# EAGLE board pcb2 (EAGLE 9.3.0)
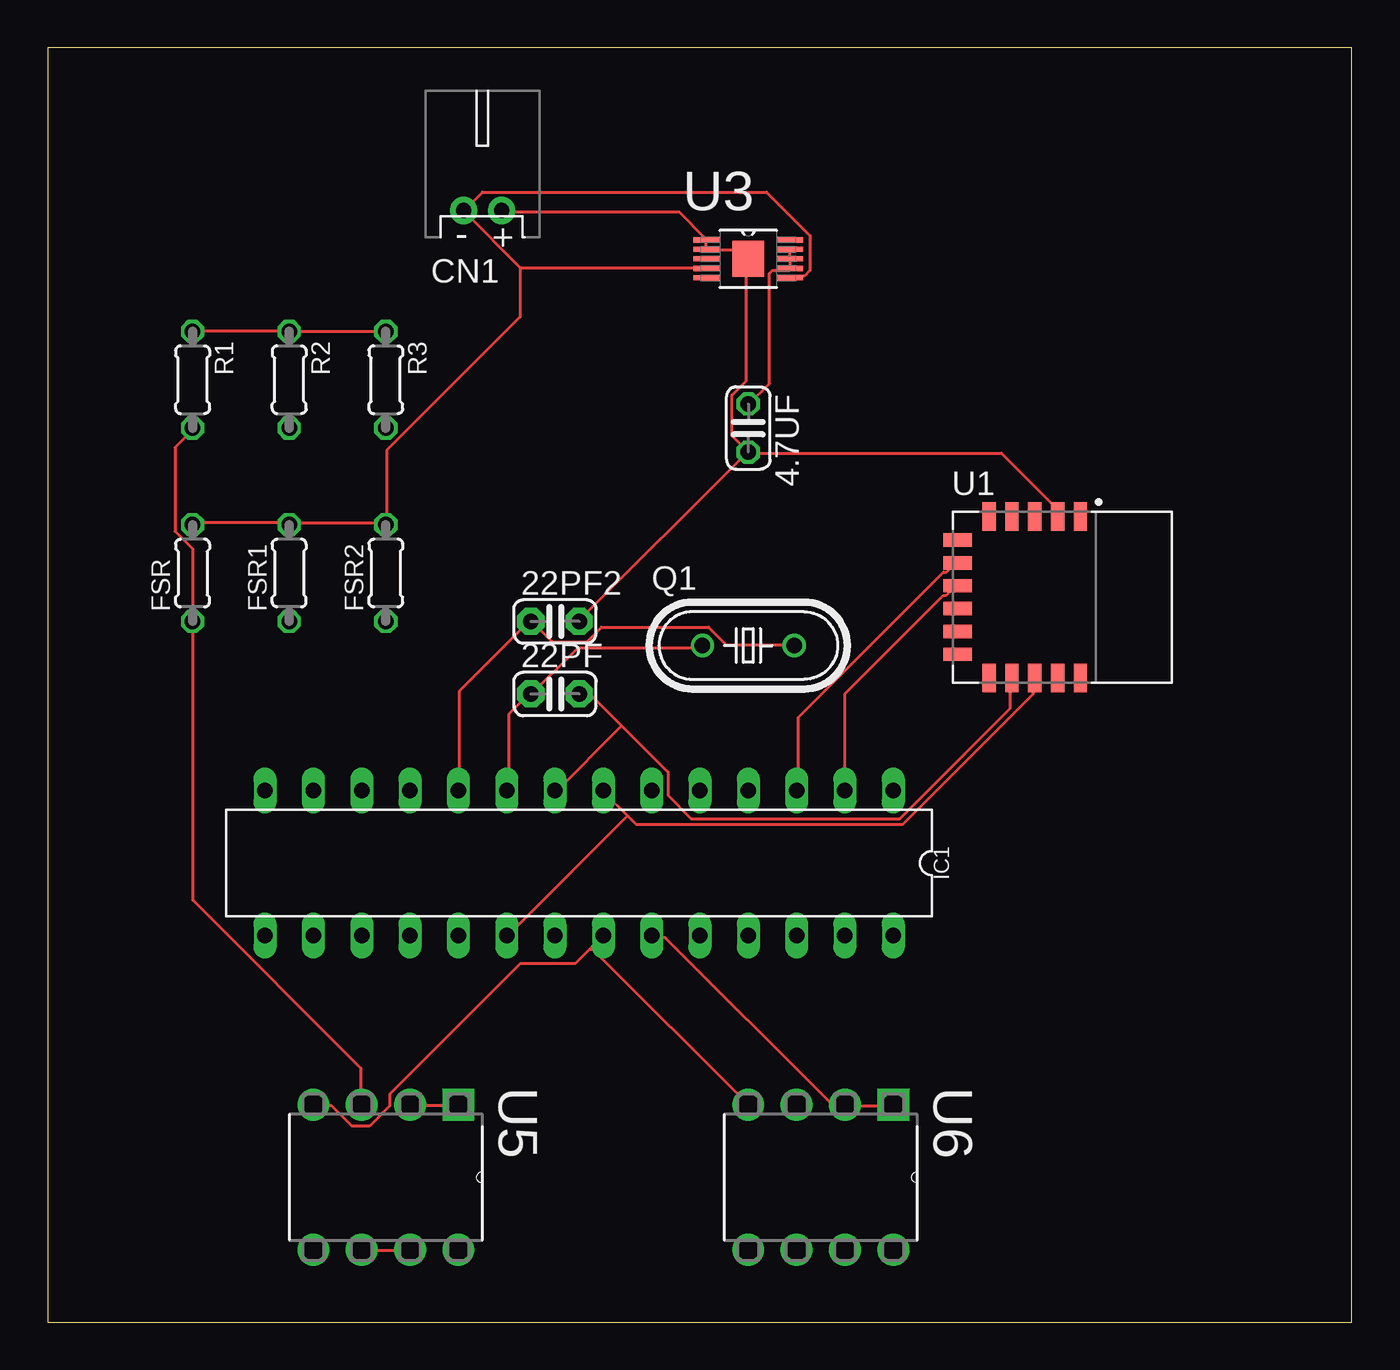
[diagram p0: board, top side]
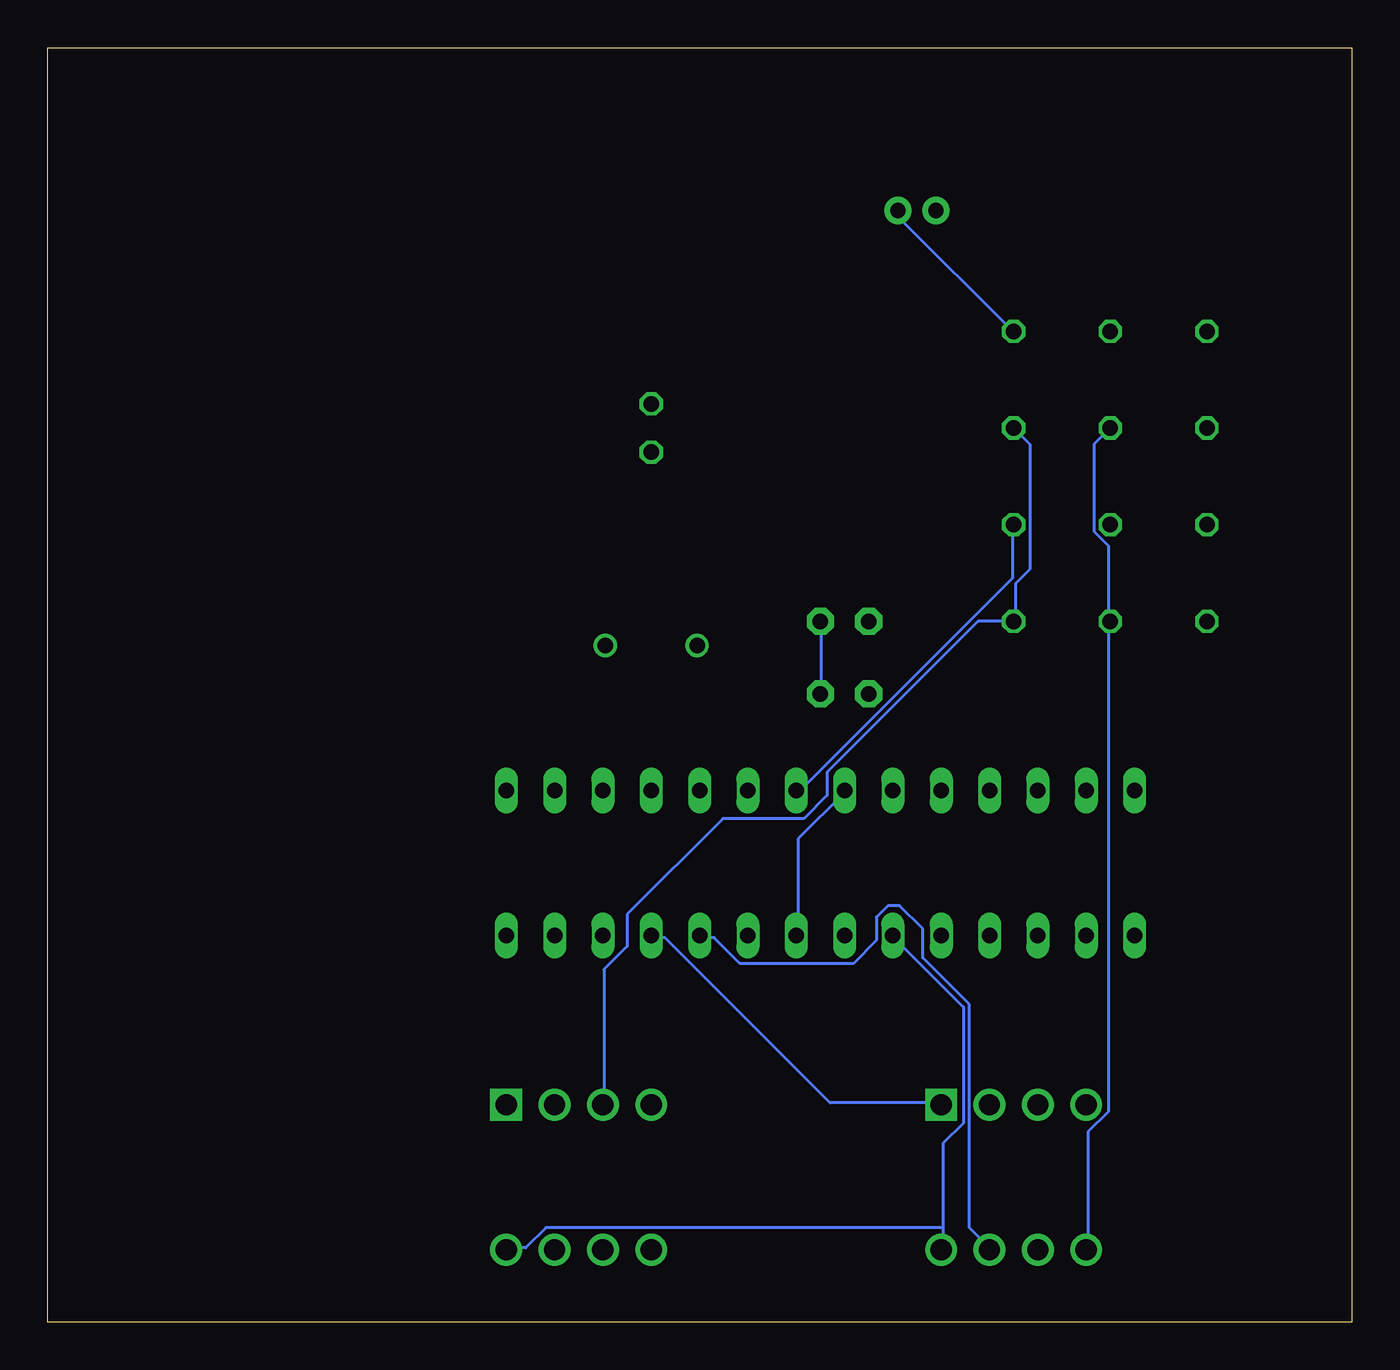
[diagram p1: board, bottom side, seen from below]

Size 68.56 x 66.98 mm. Coordinates in mm from the lower left corner, seen from the top.
Outline: 0,0 68.56,0 68.56,66.98 0,66.98 0,0
Copper layers (1*16): Top 0.035mm / dielectric 1.5mm / Bottom 0.035mm
Design rules "PCBWay_2layer": minimum track width 6mil, minimum drill 0.3mm, track to track 6mil, track to pad 6mil, pad to pad 6mil, via to via 6mil, smd to smd 4mil, copper to edge 10mil, drill to drill 6mil, minimum pad ring 6mil, minimum via ring 6mil, stop-mask expansion 4mil, vias tented up to drill 0.8mm, thermal gap 10mil

## Footprints (pad centres in the part's own frame; a part is rotated, then mirrored left to right if it is on the bottom)
C025-024X044 = drill 0.813 octagon: 1 -1.27,0; 2 1.27,0
C025-024X044' = drill 0.813 pad 1.422 octagon: 1 -1.27,0; 2 1.27,0
JST-PH-2-THM-RA = drill 0.8 pad 1.422: 1 1,0; 2 -1,0
0204/5 = drill 0.813 octagon: 1 -2.54,0; 2 2.54,0
DIL28 = drill 0.813 long: 1 -3.81,16.51; 2 -3.81,13.97; 3 -3.81,11.43; 4 -3.81,8.89; 5 -3.81,6.35; 6 -3.81,3.81; 7 -3.81,1.27; 8 -3.81,-1.27; 9 -3.81,-3.81; 10 -3.81,-6.35; 11 -3.81,-8.89; 12 -3.81,-11.43; 13 -3.81,-13.97; 14 -3.81,-16.51; 15 3.81,-16.51; 16 3.81,-13.97; 17 3.81,-11.43; 18 3.81,-8.89; 19 3.81,-6.35; 20 3.81,-3.81; 21 3.81,-1.27; 22 3.81,1.27; 23 3.81,3.81; 24 3.81,6.35; 25 3.81,8.89; 26 3.81,11.43; 27 3.81,13.97; 28 3.81,16.51
HC49U-V = drill 0.813: 1 -2.413,0; 2 2.413,0
XCVR_RN4871-V/RM118 = smd 1.5 x 0.7: 1 -4.25,0.95; 2 -4.25,-0.25; 3 -4.25,-1.45; 4 -4.25,-2.65; 5 -4.25,-3.85; 12 4.25,-3.85; 13 4.25,-2.65; 14 4.25,-1.45; 15 4.25,-0.25; 16 4.25,0.95 | smd 0.7 x 1.5: 6 -3,-5.5; 7 -1.8,-5.5; 8 -0.6,-5.5; 9 0.6,-5.5; 10 1.8,-5.5; 11 3,-5.5
SOP50P490X110-11N = smd 1.397 x 0.279: 1 -2.184,0.991; 2 -2.184,0.508; 3 -2.184,0; 4 -2.184,-0.508; 5 -2.184,-0.991; 6 2.184,-0.991; 7 2.184,-0.508; 8 2.184,0; 9 2.184,0.508; 10 2.184,0.991 | smd 1.676 x 1.88: 11 0,0
DIP254P762X508-8 = drill 1.118 square: 1 -7.62,7.62 | drill 1.118: 2 -7.62,5.08; 3 -7.62,2.54; 4 -7.62,0; 5 0,0; 6 0,2.54; 7 0,5.08; 8 0,7.62

## Placement (x,y rotation side)
4.7UF  [C025-024X044]  36.83,46.99 270 top
22PF  [C025-024X044']  26.67,33.02 0 top
22PF2  [C025-024X044']  26.67,36.83 0 top
CN1  [JST-PH-2-THM-RA]  22.86,58.42 0 top
FSR  [0204/5]  7.62,39.37 90 top
FSR1  [0204/5]  12.7,39.37 90 top
FSR2  [0204/5]  17.78,39.37 90 top
IC1  ATMEGA328-PU  [DIL28]  27.94,24.13 270 top
Q1  [HC49U-V]  36.83,35.56 0 top
R1  [0204/5]  7.62,49.53 270 top
R2  [0204/5]  12.7,49.53 270 top
R3  [0204/5]  17.78,49.53 270 top
U1  RN4871-V/RM118  [XCVR_RN4871-V/RM118]  53.34,38.1 270 top
U3  LTC3588IMSE-1PBF  [SOP50P490X110-11N]  36.83,55.88 0 top
U5  LM358P  [DIP254P762X508-8]  13.97,3.81 270 top
U6  LM358P  [DIP254P762X508-8]  36.83,3.81 270 top

## Library data of the parts
4.7UF = rcl; SPICEPREFIX: C
22PF 22PF2 CN1 = adafruit
FSR FSR1 FSR2 R1-R3 = rcl; SPICEPREFIX: R
IC1 = ATMEGA328-PU; AVAILABILITY: Unavailable; DESCRIPTION: ATmega Series 20 MHz 32 KB Flash 2 KB SRAM 8-Bit Microcontroller - DIP-28; MF: Microchip; MP: ATMEGA328-PU; PACKAGE: PDIP-28 Microchip; PRICE: None
Q1 = adafruit; OC_FARNELL: 1666969; OC_NEWARK: unknown
U1 = RN4871-V_RM118; DESCRIPTION: Bluetooth 4.2 BLE Module Shielded Antenna ASCII Interface 9x11.5mm; DIGI-KEY_PART_NUMBER: RN4871-V/RM118-ND; DIGI-KEY_PURCHASE_URL: https://www.digikey.com/product-detail/en/microchip-technology/RN4871-V-RM118/RN4871-V-RM118-ND/6130476?utm_source=snapeda&utm_medium=aggregator&utm_campaign=symbol; MF: Microchip; MP: RN4871-V/RM118; PACKAGE: SMD-16 Microchip
U3 = LTC3588IMSE-1PBF; DESCRIPTION: Piezoelectric Energy Harvesting Power Supply 10-Pin MSOP EP; DIGI-KEY_PART_NUMBER: LTC3588IMSE-1#PBF-ND; DIGI-KEY_PURCHASE_URL: https://www.digikey.com/product-detail/en/linear-technology-analog-devices/LTC3588IMSE-1-PBF/LTC3588IMSE-1-PBF-ND/2213930?utm_source=snapeda&utm_medium=aggregator&utm_campaign=symbol; MF: Linear Technology/Analog; MP: LTC3588IMSE-1#PBF; PACKAGE: MSOP-10 Linear Technology
U5 U6 = LM358P; AVAILABILITY: Unavailable; DESCRIPTION: OP Amp Dual GP Â±16V/32V 8-Pin PDIP OP Amp Dual GP Â±16V/32V 8-Pin PDIP; MF: Texas Instruments; MP: LM358P; PACKAGE: SO-8 Texas Instruments; PRICE: None

## Nets
GND: 4.7UF.2 22PF2.2 22PF.2 CN1.1 IC1.8 IC1.22 R1.1 R2.1 R3.1 U1.2 U1.13 U3.1 U3.2 U3.11 U5.4 U6.4
N$1: IC1.2 U1.8
N$2: IC1.3 U1.7
N$4: CN1.2 FSR1.2 FSR2.2 FSR.2 IC1.7 IC1.20 U1.14 U3.4 U3.6 U5.8 U6.8
N$5: FSR2.1 R3.2 U6.3
N$6: IC1.23 U6.1 U6.2
N$7: FSR.1 R1.2 U5.3
N$8: IC1.25 U5.1 U5.2
N$9: IC1.24 U5.6 U5.7
N$10: FSR1.1 R2.2 U5.5
N$11: 4.7UF.1 U3.7 U3.8 U3.9
N$12: 22PF.1 IC1.9 Q1.1
N$13: 22PF2.1 IC1.10 Q1.2

## Tracks (layer width: path | path; a pad name or v marks a point on that pad's centre or on a via)
GND
  Top 0.152: R1.1 R2.1 R3.1 | 36.73,55.88 36.27,56.34 34.75,56.34 U3.2 34.59,56.49 34.59,56.79 U3.1 34.59,56.95 33.22,58.32 23.93,58.32 CN1.1 | U1.2 53.03,42.47 53.03,42.77 50.14,45.67 36.88,45.67 4.7UF.2 | 36.73,55.88 36.73,49.48 35.97,48.72 35.97,46.58 4.7UF.2 | 36.73,55.88 U3.11 | 30.17,31.34 28.5,33.02 22PF.2 | 30.17,31.34 32.61,28.91 32.61,27.69 33.83,26.47 44.81,26.47 50.6,32.26 50.6,33.78 U1.13 | IC1.22 28.5,19.61 | 28.5,19.61 27.74,18.85 24.84,18.85 17.98,11.99 17.98,11.38 16.92,10.31 16,10.31 14.94,11.38 14.02,11.38 U5.4 | U6.4 28.65,19.61 28.5,19.61 | 30.17,31.34 26.67,27.84 IC1.8 | 4.7UF.2 36.73,45.67 27.89,36.83 22PF2.2
  Bottom 0.152: CN1.1 23.77,58.32 23.77,58.01 17.83,52.07 R3.1 | 22PF2.2 27.89,36.83 27.89,33.02 22PF.2 | IC1.22 29.11,20.37 29.11,25.4 26.67,27.84 IC1.8
N$1
  Top 0.152: IC1.2 41.91,33.02 47.09,38.2 47.24,38.2 47.7,38.66 U1.8
N$2
  Top 0.152: U1.7 47.7,39.88 47.24,39.42 47.09,39.42 39.47,31.8 39.47,27.99 IC1.3
N$4
  Top 0.152: FSR.2 7.62,42.01 12.65,42.01 FSR1.2 12.8,42.01 17.68,42.01 FSR2.2 17.83,42.01 17.83,45.82 24.84,52.83 24.84,55.42 | 24.84,55.42 34.59,55.42 U3.4 | 24.84,55.42 21.95,58.32 CN1.2 21.95,58.47 22.86,59.39 37.8,59.39 40.08,57.1 40.08,55.27 39.78,54.97 39.01,54.97 U3.6 | 30.48,26.62 29.26,27.84 IC1.7 | 30.48,26.62 30.94,26.16 44.96,26.16 51.82,33.02 51.82,33.78 U1.14 | 30.48,26.62 24.23,20.37 IC1.20
  Bottom 0.152: 21.49,4.98 21.49,9.4 20.42,10.46 20.42,16.56 24.08,20.22 IC1.20 | 21.49,4.98 21.49,3.91 U5.8 | 21.49,4.98 42.37,4.98 43.43,3.91 44.35,3.91 U6.8 | FSR2.2 17.83,41.86 17.83,39.12 29.11,27.84 IC1.7
N$5
  Bottom 0.152: R3.2 16.92,46.13 16.92,39.57 17.68,38.81 17.68,36.83 FSR2.1 19.66,36.83 27.58,28.91 27.58,27.69 28.8,26.47 33.07,26.47 38.1,21.44 38.1,19.76 39.32,18.54 39.32,11.53 U6.3
N$6
  Top 0.152: IC1.23 31.85,20.22 32.46,20.22 41.15,11.53 41.91,11.53 U6.2 41.91,11.38 44.35,11.38 U6.1
N$7
  Top 0.152: R1.2 7.62,46.89 6.71,45.97 6.71,41.55 7.62,40.64 FSR.1 7.62,22.2 16.46,13.36 16.46,11.53 U5.3
N$8
  Top 0.152: U5.2 19.05,11.38 21.49,11.38 U5.1
  Bottom 0.152: IC1.25 36.73,20.22 36.12,20.22 27.43,11.53 21.64,11.53 U5.1
N$9
  Top 0.152: U5.6 16.61,3.76 19.05,3.76 U5.7
  Bottom 0.152: IC1.24 34.29,20.22 33.53,20.22 32.16,18.85 26.21,18.85 24.99,20.07 24.99,21.28 24.38,21.9 23.77,21.9 22.55,20.68 22.55,19.15 20.12,16.71 20.12,4.98 19.05,3.91 U5.7
N$10
  Bottom 0.152: 12.8,36.83 12.8,40.79 13.56,41.55 13.56,46.13 R2.2 | 12.8,36.83 12.8,11.07 13.87,10.01 13.87,3.91 U5.5 | 12.8,36.83 FSR1.1
N$11
  Top 0.152: U3.9 U3.8 U3.7 39.01,55.27 38.1,55.27 37.95,55.12 37.95,49.33 36.88,48.26 4.7UF.1
N$12
  Top 0.152: IC1.9 24.23,27.99 24.23,31.95 25.3,33.02 22PF.1 25.45,33.02 27.89,35.46 34.29,35.46 Q1.1
N$13
  Top 0.152: IC1.10 21.64,27.99 21.64,33.17 25.3,36.83 22PF2.1 25.45,36.83 26.52,35.76 28.35,35.76 29.11,36.52 34.75,36.52 35.66,35.61 39.17,35.61 Q1.2